# Altium PCB 606-100863-r01.pcbdoc (part 2 of 2)
Units mm, origin at the board's own origin, x right, y up, seen from the top; angles counter-clockwise.
Board outline 84 x 22 mm, 2 copper layers (Top Layer, Bottom Layer), stack 1.471 mm thick; 41 components, 20 nets, 117 pads, 44 vias.
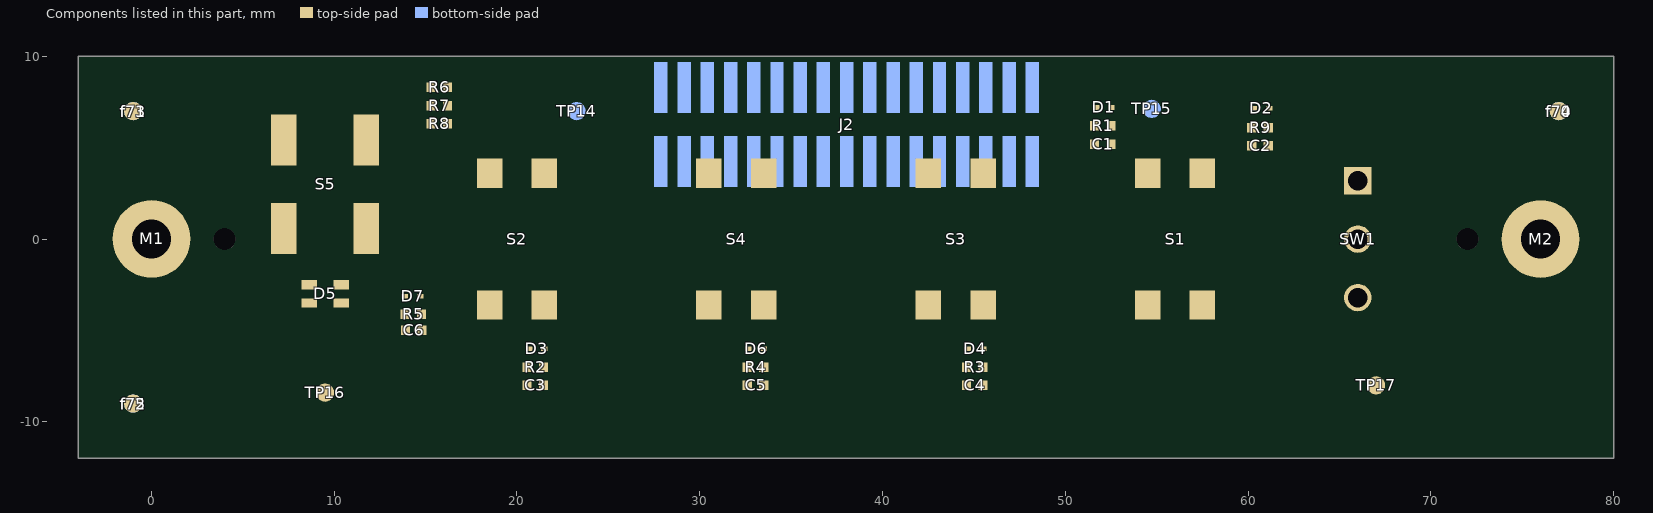
[diagram p2: the components of this part, seen from the top]

## Silkscreen, mask and mechanical layers (free items; w line width, h text height) (continued)
Drill Drawing:
  circle w0.254: c119.937,-8.007 r0.847
  lines w0.254: 119.09,-16.473 119.937,-16.05 120.783,-16.473 120.36,-15.627 120.783,-14.78 119.937,-15.203 119.09,-14.78 119.513,-15.627 119.09,-16.473 ; 119.09,-10.97 120.783,-10.97 119.937,-12.663 119.09,-10.97 ; 119.09,-5.043 120.783,-5.043 120.783,-3.35 119.09,-3.35 119.09,-5.043
  lines w0.381: 117.571,-17.616 323.865,-17.616 ; 117.571,-2.376 323.865,-2.376 ; 131.564,-21.426 131.564,1.434 ; 145.022,-21.426 145.022,1.434 ; 172.7,-21.426 172.7,1.434 ; 185.549,-21.426 185.549,1.434 ; 204.188,-21.426 204.188,1.434 ; 242.277,-21.426 242.277,1.434 ; 257.259,-21.426 257.259,1.434 ; 276.202,-21.426 276.202,1.434 ; 295.247,-21.426 295.247,1.434 ; 117.571,-21.426 323.865,-21.426 323.865,1.434 117.571,1.434 117.571,-21.426
  text "Symbol" at 119.857,-1.233 h1.83
  text "Count" at 132.707,-1.233 h1.83
  text "Hole Size" at 146.165,-1.233 h1.83
  text "Plated" at 173.843,-1.233 h1.83
  text "Hole Type" at 186.692,-1.233 h1.83
  text "Drill Layer Pair" at 205.331,-1.233 h1.83
  text "Via/Pad" at 243.42,-1.233 h1.83
  text "Pad Shape" at 258.402,-1.233 h1.83
  text "Template" at 277.345,-1.233 h1.83
  text "Hole Tolerance" at 296.39,-1.233 h1.83
  text "44" at 132.707,-5.043 h1.52
  text "0.250mm (9.84mil)" at 146.165,-5.043 h1.52
  text "PTH" at 173.843,-5.043 h1.52
  text "Round" at 186.692,-5.043 h1.52
  text "Top Layer - Bottom Layer" at 205.331,-5.043 h1.52
  text "Via" at 243.42,-5.043 h1.52
  text "Rounded" at 258.402,-5.043 h1.52
  text "v50h25m0mx0" at 277.345,-5.043 h1.52
  text "3" at 132.707,-8.853 h1.52
  text "1.070mm (42.13mil)" at 146.165,-8.853 h1.52
  text "PTH" at 173.843,-8.853 h1.52
  text "Round" at 186.692,-8.853 h1.52
  text "Top Layer - Bottom Layer" at 205.331,-8.853 h1.52
  text "Pad" at 243.42,-8.853 h1.52
  text "(Mixed)" at 258.402,-8.853 h1.52
  text "(Mixed)" at 277.345,-8.853 h1.52
  text "2" at 132.707,-12.663 h1.52
  text "1.200mm (47.24mil)" at 146.165,-12.663 h1.52
  text "NPTH" at 173.843,-12.663 h1.52
  text "Round" at 186.692,-12.663 h1.52
  text "Top Layer - Bottom Layer" at 205.331,-12.663 h1.52
  text "Pad" at 243.42,-12.663 h1.52
  text "Rounded" at 258.402,-12.663 h1.52
  text "c120hn120" at 277.345,-12.663 h1.52
  text "2" at 132.707,-16.473 h1.52
  text "2.150mm (84.65mil)" at 146.165,-16.473 h1.52
  text "PTH" at 173.843,-16.473 h1.52
  text "Round" at 186.692,-16.473 h1.52
  text "Top Layer - Bottom Layer" at 205.331,-16.473 h1.52
  text "Pad" at 243.42,-16.473 h1.52
  text "Rounded" at 258.402,-16.473 h1.52
  text "c425h215" at 277.345,-16.473 h1.52
  text "51 Total" at 132.707,-20.283 h1.52
  text ".Layer_Name" at 17.581,-25.042 h3.81
DXF_TOP:
  drawing of 154 lines, arcs and shapes, not listed

## Dimensions
179.186,34.92 to 190.2,50.7 on FAB_DWG

## Text inside footprints (layer, text, board x,y; h text height)
D1: Mechanical 32 "C" at 53.345,7.512 h0.64 r180; Mechanical 32 "A" at 51.34,7.52 h0.64 r180
D2: Mechanical 32 "C" at 61.975,7.462 h0.64 r180; Mechanical 32 "A" at 59.97,7.47 h0.64 r180
D3: Mechanical 32 "C" at 22.325,-5.688 h0.64 r180; Mechanical 32 "A" at 20.32,-5.68 h0.64 r180
D4: Mechanical 32 "C" at 46.325,-5.688 h0.64 r180; Mechanical 32 "A" at 44.32,-5.68 h0.64 r180
D6: Mechanical 32 "C" at 34.325,-5.688 h0.64 r180; Mechanical 32 "A" at 32.32,-5.68 h0.64 r180
D7: Mechanical 32 "C" at 13.043,-3.431 h0.64; Mechanical 32 "A" at 15.048,-3.44 h0.64
J2: Bottom Overlay "1" at 27.101,8.675 h0.76
M1: Mechanical 18 "1" at -1.771,0.011 h0.64
M2: Mechanical 18 "1" at 74.222,0 h0.64
SW1: Top Overlay "3" at 68,-6 h1 r270; Top Overlay "1" at 68,6.5 h1 r270